# Altium PCB SpinASM.PcbDoc (part 2 of 2)
Units mm, origin at the board's own origin, x right, y up, seen from the top; angles counter-clockwise.
Board outline 49.03 x 19.5 mm, 2 copper layers (Top Layer, Bottom Layer), stack 1.57 mm thick; 27 components, 24 nets, 120 pads, 102 vias.
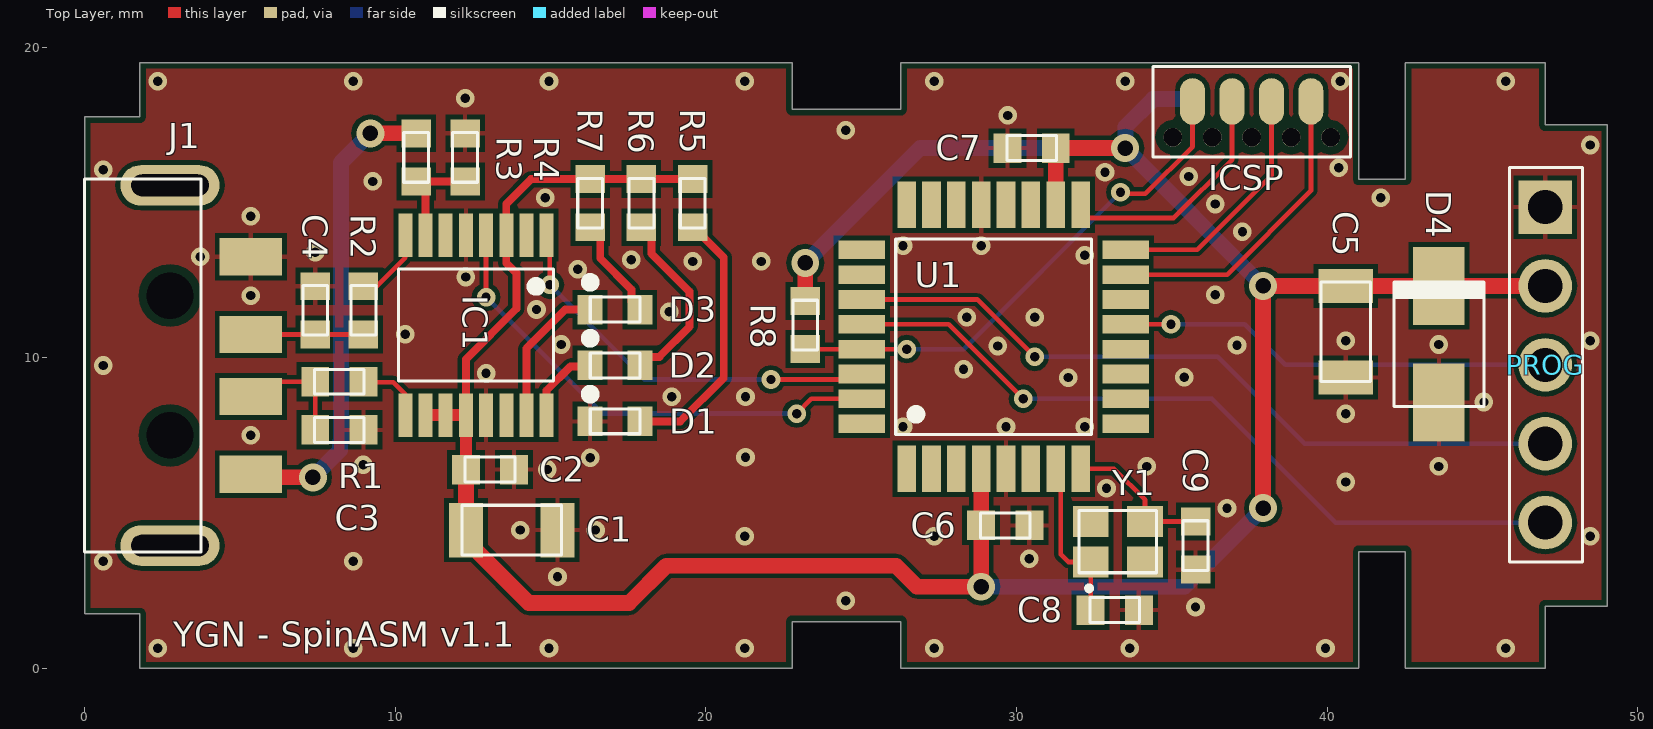
[diagram p0: Top Layer view]

## Silkscreen, mask and mechanical layers (free items; w line width, h text height) (continued)
Route Tool Path: (continued)
  lines w1.4: 29.3,-0.7 26.275,-0.7 ; 29.3,20.2 26.275,20.2 ; 35.8,-0.7 41.025,-0.7 ; 35.8,20.2 41.025,20.2 ; -0.7,1.75 ccw(c0,1.75) 0,1.05 ; -0.7,1.75 ccw(c0,1.75) 0,1.05 ; -0.7,1.75 ccw(c0,1.75) 0,1.05 ; -0.7,1.75 ccw(c0,1.75) 0,1.05 ; -0.7,1.75 -0.7,6.5 -0.7,1.75 ; -0.7,17.75 cw(c0,17.75) 0,18.45 ; -0.7,17.75 cw(c0,17.75) 0,18.45 ; -0.7,17.75 cw(c0,17.75) 0,18.45 ; -0.7,17.75 cw(c0,17.75) 0,18.45 ; -0.7,17.75 -0.7,13 -0.7,17.75 ; 0,1.05 1.075,1.05 ; 0,1.05 1.075,1.05 ; 0,18.45 1.075,18.45 ; 1.075,0 ccw(c1.775,0) 1.775,-0.7 ; 1.075,0 ccw(c1.775,0) 1.775,-0.7 ; 1.075,0 ccw(c1.775,0) 1.775,-0.7 ; 1.075,0 ccw(c1.775,0) 1.775,-0.7 ; 1.075,0 1.075,1.05 ; 1.075,0 1.075,1.05 ; 1.075,18.45 1.075,19.5 ; 1.075,18.45 1.075,19.5 ; 1.075,19.5 cw(c1.775,19.5) 1.775,20.2 ; 1.075,19.5 cw(c1.775,19.5) 1.775,20.2 ; 1.075,19.5 cw(c1.775,19.5) 1.775,20.2 ; 1.075,19.5 cw(c1.775,19.5) 1.775,20.2 ; 1.775,-0.7 6.775,-0.7 1.775,-0.7 ; 1.775,20.2 6.8,20.2 1.775,20.2 ; 22.775,-0.7 ccw(c22.775,0) 23.475,0 ; 22.775,-0.7 ccw(c22.775,0) 23.475,0 ; 22.775,-0.7 ccw(c22.775,0) 23.475,0 ; 22.775,-0.7 ccw(c22.775,0) 23.475,0 ; 22.775,-0.7 13.3,-0.7 22.775,-0.7 ; 22.775,20.2 cw(c22.775,19.5) 23.475,19.5 ; 22.775,20.2 cw(c22.775,19.5) 23.475,19.5 ; 22.775,20.2 cw(c22.775,19.5) 23.475,19.5 ; 22.775,20.2 cw(c22.775,19.5) 23.475,19.5 ; 23.475,0 23.475,0.8 ; 23.475,0 23.475,0.8 ; 23.475,0.8 25.575,0.8 ; 23.475,0.8 25.575,0.8 ; 23.475,18.7 23.475,19.5 ; 23.475,18.7 25.575,18.7 ; 23.475,18.7 25.575,18.7 ; 23.475,18.7 23.475,19.5 ; 25.575,0 ccw(c26.275,0) 26.275,-0.7 ; 25.575,0 ccw(c26.275,0) 26.275,-0.7 ; 25.575,0 ccw(c26.275,0) 26.275,-0.7 ; 25.575,0 ccw(c26.275,0) 26.275,-0.7 ; 25.575,0 25.575,0.8 ; 25.575,0 25.575,0.8 ; 25.575,18.7 25.575,19.5 ; 25.575,18.7 25.575,19.5 ; 25.575,19.5 cw(c26.275,19.5) 26.275,20.2 ; 25.575,19.5 cw(c26.275,19.5) 26.275,20.2 ; 25.575,19.5 cw(c26.275,19.5) 26.275,20.2 ; 25.575,19.5 cw(c26.275,19.5) 26.275,20.2 ; 41.025,-0.7 ccw(c41.025,0) 41.725,0 ; 41.025,-0.7 ccw(c41.025,0) 41.725,0 ; 41.025,-0.7 ccw(c41.025,0) 41.725,0 ; 41.025,-0.7 ccw(c41.025,0) 41.725,0 ; 41.025,20.2 cw(c41.025,19.5) 41.725,19.5 ; 41.025,20.2 cw(c41.025,19.5) 41.725,19.5 ; 41.025,20.2 cw(c41.025,19.5) 41.725,19.5 ; 41.025,20.2 cw(c41.025,19.5) 41.725,19.5 ; 41.725,0 41.725,3.05 ; 41.725,0 41.725,3.05 ; 41.725,3.05 41.825,3.05 ; 41.725,3.05 41.825,3.05 ; 41.725,16.45 41.825,16.45 ; 41.725,16.45 41.725,19.5 ; 41.725,16.45 41.825,16.45 ; 41.725,16.45 41.725,19.5 ; 41.825,0 ccw(c42.525,0) 42.525,-0.7 ; 41.825,0 ccw(c42.525,0) 42.525,-0.7 ; 41.825,0 ccw(c42.525,0) 42.525,-0.7 ; 41.825,0 ccw(c42.525,0) 42.525,-0.7 ; 41.825,0 41.825,3.05 ; 41.825,0 41.825,3.05 ; 41.825,16.45 41.825,19.5 ; 41.825,16.45 41.825,19.5 ; 41.825,19.5 cw(c42.525,19.5) 42.525,20.2 ; 41.825,19.5 cw(c42.525,19.5) 42.525,20.2 ; 41.825,19.5 cw(c42.525,19.5) 42.525,20.2 ; 41.825,19.5 cw(c42.525,19.5) 42.525,20.2 ; 42.525,-0.7 47.025,-0.7 ; 42.525,-0.7 47.025,-0.7 ; 42.525,20.2 47.025,20.2 ; 42.525,20.2 47.025,20.2 ; 47.025,-0.7 ccw(c47.025,0) 47.725,0 ; 47.025,-0.7 ccw(c47.025,0) 47.725,0 ; 47.025,-0.7 ccw(c47.025,0) 47.725,0 ; 47.025,-0.7 ccw(c47.025,0) 47.725,0 ; 47.025,20.2 cw(c47.025,19.5) 47.725,19.5 ; 47.025,20.2 cw(c47.025,19.5) 47.725,19.5 ; 47.025,20.2 cw(c47.025,19.5) 47.725,19.5 ; 47.025,20.2 cw(c47.025,19.5) 47.725,19.5 ; 47.725,0 47.725,1.3 ; 47.725,0 47.725,1.3 ; 47.725,1.3 49.025,1.3 ; 47.725,1.3 49.025,1.3 ; 47.725,18.2 49.025,18.2 ; 47.725,18.2 47.725,19.5 ; 47.725,18.2 49.025,18.2 ; 47.725,18.2 47.725,19.5 ; 49.025,1.3 ccw(c49.025,2) 49.725,2 ; 49.025,1.3 ccw(c49.025,2) 49.725,2 ; 49.025,1.3 ccw(c49.025,2) 49.725,2 ; 49.025,1.3 ccw(c49.025,2) 49.725,2 ; 49.025,18.2 cw(c49.025,17.5) 49.725,17.5 ; 49.025,18.2 cw(c49.025,17.5) 49.725,17.5 ; 49.025,18.2 cw(c49.025,17.5) 49.725,17.5 ; 49.025,18.2 cw(c49.025,17.5) 49.725,17.5 ; 49.725,2 49.725,6.5 49.725,2 ; 49.725,17.5 49.725,13 49.725,17.5 ; 13.3,20.2 22.891,20.2 13.3,20.2